# Altium PCB PCB1.PcbDoc
Units mil, origin at the board's own origin, x right, y up, seen from the top; angles counter-clockwise.
Board outline 2940 x 1375 mil, 2 copper layers (Top Layer, Bottom Layer); 36 components, 23 nets, 118 pads, 191 vias.
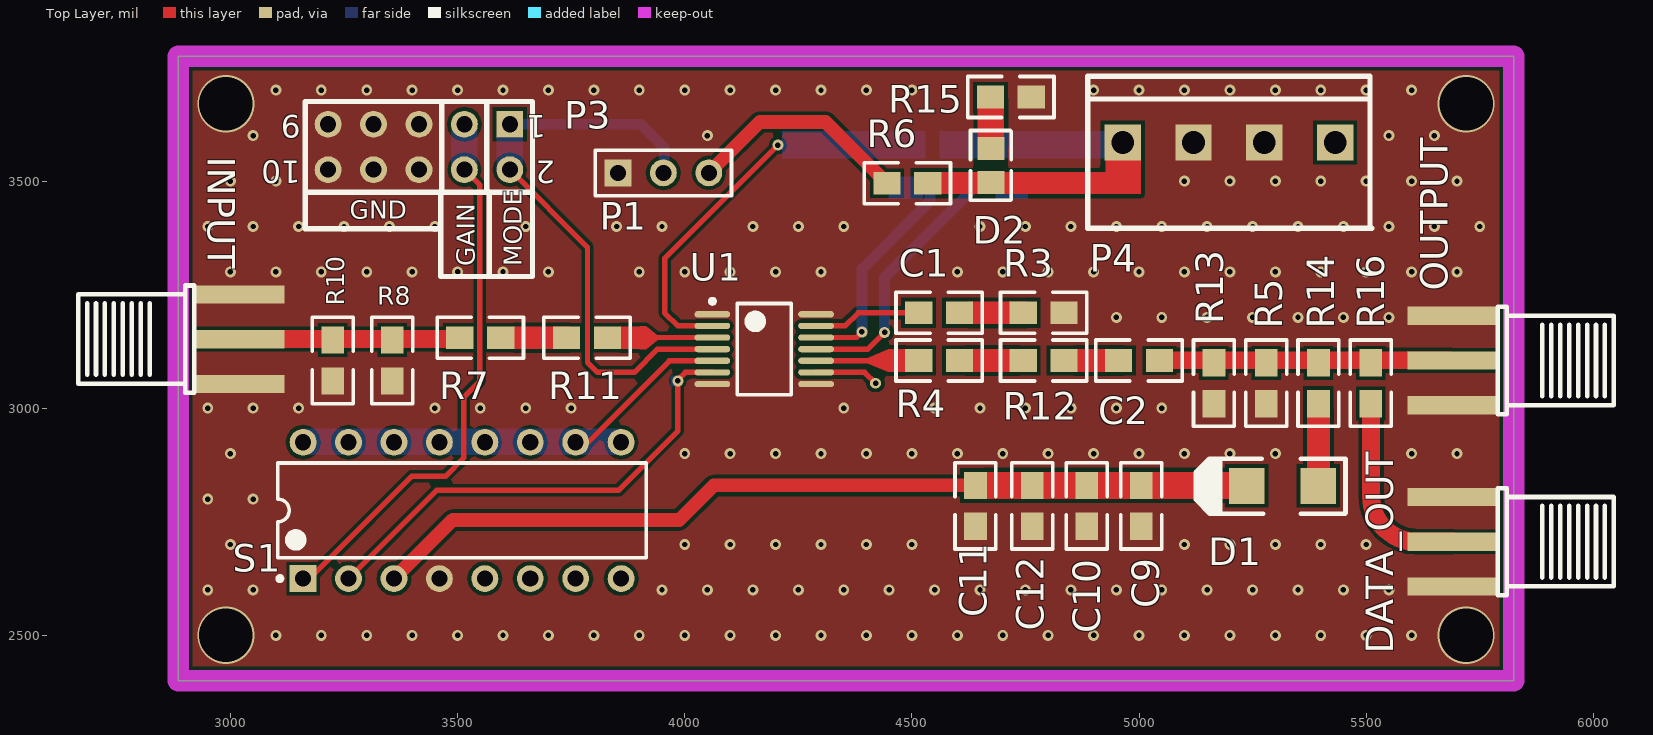
[diagram p0: Top Layer view]
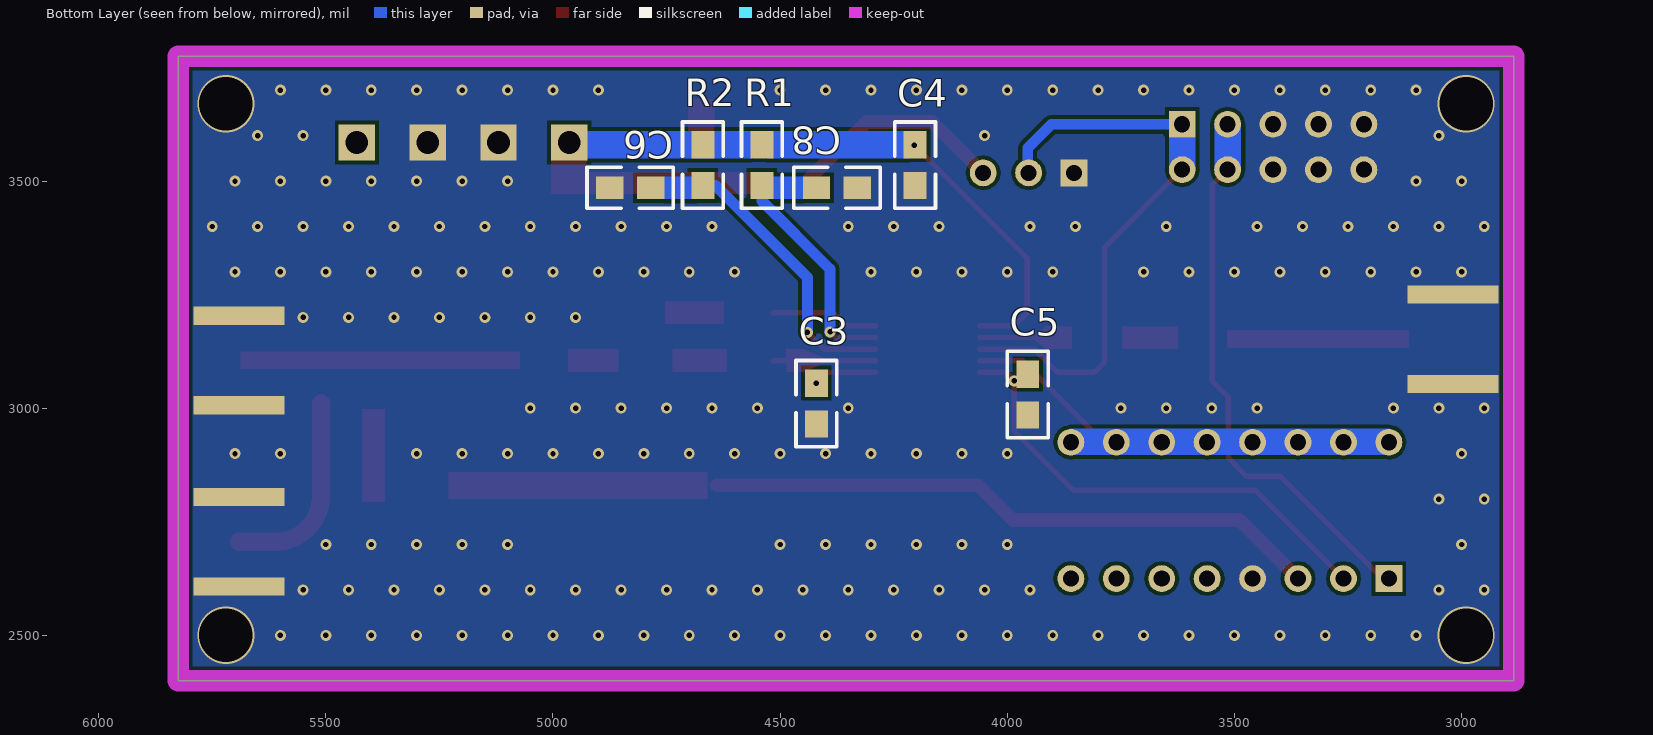
[diagram p1: Bottom Layer view, seen from below]

## Layer stack, top to bottom
Top Solder: solder mask 0.4, Solder Resist, Dk 3.5
Top Layer: signal copper 1.4
Dielectric 1: dielectric 12.6, FR-4, Dk 4.8
Bottom Layer: signal copper 1.4
Bottom Solder: solder mask 0.4, Solder Resist, Dk 3.5

## Board outline
2885,2400 2885,3775 5825,3775 5825,2400

## Design rules (kind name [scope] priority, off if disabled: settings)
Clearance [All] p1: gap=8
PolygonConnect [All] p1: connectstyle=Direct reliefconductorwidth=10 reliefentries=4 polygonreliefangle="90 Angle" airgapwidth=10
RoutingVias [All] p1: holewidth=28 width=50 viastyle="Through Hole" minholewidth=28 minwidth=50 maxholewidth=28 maxwidth=50
SolderMaskExpansion [All] p1: expansion=4
Width [All] p1: maxlimit=90 minlimit=8 preferedwidth=10
30 further rules are at their usual default settings.

## Components (designator, comment, footprint, x,y, rotation, side; value= is the part's Value field where it differs from the comment)
C1 "10nF" 0805 4605,3210 r180 top
C2 "0.1uf" 0805 5045,3105 r180 top
C3 "10nF" 0805 4420,2965 r90 bottom
C4 "1uF" 0805 4203,3490 r90 bottom
C5 "0.1uf" 0805 3955,2985 r90 bottom
C6 "0.1uf" 0805 4875,3485 r180 bottom
C8 "0.1uf" 0805 4330,3485 r0 bottom
C9 "0.1uf" 0805 5005,2740 r90 top
C10 "0.1uf" 0805 4885,2740 r90 top
C11 "0.1uf" 0805 4640,2830 r270 top
C12 "0.1uf" 0805 4765,2830 r270 top
D1 "5.6V" SMA/DO-214AC 5394.48,2829 r180 top
D2 "LED" 0805_s 4660.22,3555.07 r90 top
DATA_OUT "差分输出" SMA-LYING 5750,2710 r180 top (schematic designator Vo_S3)
INPUT "差分输出" SMA-LYING 2960,3148 r0 top (schematic designator Vo_S1)
OUTPUT "差分输出" SMA-LYING 5750,3109 r180 top (schematic designator Vo_S2)
P1 "Header 3" HDR1X3 3853,3518 r0 top
P3 "Header 5X2" HDR2X5 3615,3625 r180 top
P4 "VH3.96-4A" VH3.96-4P 4887.32,3730.67 r0 top
R1 "4.7R" 0805 4540,3490 r90 bottom
R2 "4.7R" 0805 4670,3490 r90 bottom
R3 "100R" 0805 4835,3210 r180 top
R4 "150R" 0805 4605,3105 r180 top
R5 "820R" 0805 5280,3010 r90 top
R6 "10k" 0805 4535,3495 r180 top
R7 "150R" 0805 3595,3155 r180 top
R8 "820R" 0805 3356,3060 r90 top
R10 "62R" 0805 3225,3060 r90 top
R11 "24R" 0805 3740,3155 r0 top
R12 "24R" 0805 4745,3105 r0 top
R13 "62R" 0805 5165,3010 r90 top
R14 "200K" 0805 5395,3010 r90 top
R15 "200K" 0805 4673,3685 r0 top
R16 "200K" 0805 5510,3100 r270 top
S1 "SW DIP-8" DIP-16 3510,2775 r90 top
U1 "AD8367" TSSOP14_M 4175,3130 r0 top

## Footprints (in the part's own frame and the unit in brackets; to place one, negate y for a bottom-side part, rotate by r counter-clockwise, add the part's x,y. Pads: shape width x height; smd on the part's side, far side on the other; paste and mask are expansions set on the pad)
0805 [mil]
  rect 60x50 smd: 1(0,0) 2(90,0)
  silkscreen extent -50,-45 140,45
0805_s [mm]
  rect 1.3x1.499 smd: 1(0.425,-0.35) 2(-1.475,-0.35)
  silkscreen extent -2.47,-1.49 1.43,0.79
DIP-16 [mm] "DIP, 16-Pin, Row Spacing 7.62 mm, Pitch 2.54 mm"
  rect 1.5x1.5 hole 0.9: 1(-3.81,8.89)
  round 1.5 hole 0.9: 2(-3.81,6.35) 3(-3.81,3.81) 4(-3.81,1.27) 5(-3.81,-1.27) 6(-3.81,-3.81) 7(-3.81,-6.35) 8(-3.81,-8.89) 9(3.81,-8.89) 10(3.81,-6.35) 11(3.81,-3.81) 12(3.81,-1.27) 13(3.81,1.27) 14(3.81,3.81) 15(3.81,6.35) 16(3.81,8.89)
  silkscreen extent -3.93,-10.3 2.65,10.31, body extent -3.6,-10.28 3.6,10.28, height 5.08
HDR1X3 [mm] "Connector; Header; 3 Position"
  rect 1.5x1.5 hole 0.9: 1(0,0)
  round 1.5 hole 0.9: 2(2.54,0) 3(5.08,0)
  silkscreen extent -1.27,-1.27 6.35,1.27
HDR2X5 [mm] "Connector; Header; 5x2 Position"
  rect 1.5x1.5 hole 0.9: 1(0,0)
  round 1.5 hole 0.9: 2(0,2.54) 3(2.54,0) 4(2.54,2.54) 5(5.08,0) 6(5.08,2.54) 7(7.62,0) 8(7.62,2.54) 9(10.16,0) 10(10.16,2.54)
  silkscreen extent -1.27,-1.27 11.43,3.81
SMA-LYING [mm]
  rect 5.08x1.016 smd: 0(1.5,0.1) 1(1.5,2.6) 1(1.5,-2.4)
  rect 5.08x1.016 smd far side: 1(1.5,2.6) 1(1.5,-2.4)
  silkscreen extent -7.5,-2.9 -1,3.1
SMA/DO-214AC [mm]
  rect 2x2 smd: 1(0,0) 2(4,0)
  silkscreen extent -1.52,-1.52 6.86,1.55
TSSOP14_M [mm] "TSSOP, 14-Leads, Body 5.1x4.5mm, Pitch 0.65mm, IPC Low Density"
  oval 2x0.35 smd: 1(-2.9,1.95) 2(-2.9,1.3) 3(-2.9,0.65) 4(-2.9,0) 5(-2.9,-0.65) 6(-2.9,-1.3) 7(-2.9,-1.95) 8(2.9,-1.95) 9(2.9,-1.3) 10(2.9,-0.65) 11(2.9,0) 12(2.9,0.65) 13(2.9,1.3) 14(2.9,1.95)
  silkscreen extent -3.02,-2.55 1.5,2.8, body extent -2.25,-2.55 2.25,2.55, height 1.2
VH3.96-4P [mil]
  rect 80x80 hole 50: 1(76.77,-145.67) 2(232.68,-145.67) 3(388.58,-145.67) 4(544.49,-145.67)
  silkscreen extent 0,-335 625,0

## Part data
C1 C2 C3 C4 C5 C6 C8 C9 C10 C11 C12: library part Cap
D1: library part 肖特基-5.6V
DATA_OUT INPUT OUTPUT: library part SMA
P1: "Header, 3-Pin"
P3: "Header, 5-Pin, Dual row"
R1 R2 R3 R4 R5 R6 R7 R8 R10 R11 R12 R13 R14 R15 R16: library part Res
S1: "DIP Switch, 8 Position, SPST"

## Via types
v1: diameter 24, hole 12, Top Layer to Bottom Layer, 187 vias
v2: diameter 125.98, hole 118.11, Top Layer to Bottom Layer, 4 vias

## Nets (pads, with @x,y where several pads share a name; then routed paths per layer and width w, separated by ;. In a path a pad name is that pad's centre, name@x,y a point inside that pad or via, vN(x,y) a via of type N, cw(c..) or ccw(c..) an arc to the next point about the centre after c; other vN are vias at no path point)
5V: C4.2 D2.2 P4.1 R1.2 R2.2 R6.1 U1.2 | length 588.9
  Top Layer w12: U1.2 3984.82,3181.18 3956,3210 3956,3330 v1(4205,3579)
DETO: C5.2 S1.2 U1.6 | length 1054.8
  Top Layer w12: S1.2 3454,2819 3854,2819 3985,2950 v1(3985,3060) 3985,3062.64 4001.18,3078.82 U1.6
DIO: C9.2 C10.2 C11.1 C12.1 D1.2 S1.3 | length 1364.9
  Top Layer w30: S1.3 3489,2754 3988,2754 4064,2830 C11.1
GAIN: S1.9 S1.10 S1.11 S1.12 S1.13 S1.14 S1.15 S1.16 U1.5 | length 375.1
  Top Layer w12: S1.10 3787,2925 3966.41,3104.41 U1.5
GND: C3.1 C4.1 C5.1 C6.1 C8.1 C9.1 C10.1 C11.2 C12.2 DATA_OUT.1 INPUT.1 OUTPUT.1 P1.1 P3.5 P3.6 P3.7 P3.8 P3.9 P3.10 P4.2 P4.3 R3.1 R5.1 R8.1 R10.1 R13.1 R15.2 S1.4 U1.1 U1.7 U1.8 U1.14
  other v1: 3100,2500 3200,2500 3300,2500 3400,2500 3500,2500 3600,2500 3700,2500 3800,2500 3900,2500 4000,2500 4100,2500 4200,2500 4300,2500 4400,2500 4500,2500 4600,2500 4700,2500 4800,2500 4900,2500 5000,2500 5100,2500 5200,2500 5300,2500 5400,2500 5500,2500 5600,2500 2950,2600 3050,2600 3950,2600 4050,2600 4150,2600 4250,2600 4350,2600 4450,2600 4550,2600 4650,2600 4750,2600 4850,2600 4950,2600 5050,2600 5150,2600 5250,2600 5350,2600 5450,2600 5550,2600 3000,2700 4000,2700 4100,2700 4200,2700 4300,2700 4400,2700 4500,2700 5100,2700 5200,2700 5300,2700 5400,2700 5500,2700 2950,2800 3050,2800 3000,2900 4000,2900 4100,2900 4200,2900 4300,2900 4400,2900 4500,2900 4600,2900 4700,2900 4800,2900 4900,2900 5000,2900 5100,2900 5200,2900 5300,2900 5600,2900 5700,2900 2950,3000 3050,3000 3150,3000 3450,3000 3550,3000 3650,3000 3750,3000 4350,3000 4550,3000 4650,3000 4750,3000 4850,3000 4950,3000 5050,3000 4950,3200 5050,3200 5150,3200 5250,3200 5350,3200 5450,3200 5550,3200 3000,3300 3100,3300 3200,3300 3300,3300 3400,3300 3500,3300 3600,3300 3700,3300 3900,3300 4000,3300 4100,3300 4200,3300 4300,3300 4600,3300 4700,3300 4800,3300 4900,3300 5000,3300 5100,3300 5200,3300 5300,3300 5400,3300 5500,3300 5600,3300 5700,3300 2950,3400 3050,3400 3150,3400 3250,3400 3350,3400 3450,3400 3650,3400 3850,3400 3950,3400 4150,3400 4250,3400 4350,3400 4650,3400 4750,3400 4850,3400 4950,3400 5050,3400 5150,3400 5250,3400 5350,3400 5450,3400 5550,3400 5650,3400 5750,3400 3000,3500 3100,3500 5100,3500 5200,3500 5300,3500 5400,3500 5500,3500 5600,3500 5700,3500 3050,3600 4050,3600 5550,3600 5650,3600 3100,3700 3200,3700 3300,3700 3400,3700 3500,3700 3600,3700 3700,3700 3800,3700 3900,3700 4000,3700 4100,3700 4200,3700 4300,3700 4400,3700 4500,3700 4900,3700 5000,3700 5100,3700 5200,3700 5300,3700 5400,3700 5500,3700 5600,3700
  other v2: 2990,2500 5720,2500 2990,3670 5720,3670
MCU: P3.3 P3.4 S1.1 | length 1126.8
  Top Layer w12: S1.1 3174,2625 3399,2850 3473,2850 3514,2891 3514,3025 3549,3060 3549,3491 P3.4
MODE: P1.2 P3.1 P3.2 U1.4 | length 1216.4
  Top Layer w12: P3.2 3786,3354 3786,3101 3808,3079 3889,3079 3940,3130 U1.4
  Bottom Layer w24: P3.1 3903,3625 3955,3573 P1.2@3955,3518
NetC1_1: C1.1 R3.2
NetC1_2: C1.2 U1.13 | length 237.8
  Top Layer w12: U1.13 4353.18,3181.18 4382,3210 C1.2
NetC2_1: C2.1 OUTPUT.0 R5.2 R13.2 R14.2 R16.1
NetC2_2: C2.2 R12.2
NetC3_2: C3.2 U1.9 | length 140.7
  Top Layer w12: U1.9 4396.18,3078.82 v1(4420,3055)
NetC6_2: C6.2 R2.1 U1.11 | length 600.8
  Top Layer w12: U1.11 4403,3130 v1(4440,3167)
  Bottom Layer w24: v1(4440,3167) 4440,3288 4642,3490 R2.1
NetC8_2: C8.2 R1.1 U1.12 | length 490.1
  Top Layer w12: U1.12 4377.59,3155.59 v1(4390,3168)
  Bottom Layer w24: v1(4390,3168) 4390,3306 4540,3456 R1.1
NetD1_1: D1.1 R14.1
NetD2_1: D2.1 R15.1
NetP1_3: P1.3 R6.2 | length 494.3
  Top Layer w30: P1.3 4165,3630 4310,3630 R6.2
NetR4_1: R4.1 R12.1
NetR4_2: R4.2 U1.10 | length 226.4
  Top Layer w12: U1.10 4515,3104.41 R4.2
NetR7_1: R7.1 R11.1
NetR7_2: INPUT.0 R7.2 R8.2 R10.2
NetR11_2: R11.2 U1.3 | length 165.2
  Top Layer w12: 3895.59,3155.59 U1.3
NetR16_2: DATA_OUT.0 R16.2 | length 441.5
  Top Layer w40: R16.2 cw(c5510,3009) 5511,3009 5511,2806.06 ccw(c5611,2806.06) 5611,2706.06 DATA_OUT.0
pads on no net: P4.4 S1.5 S1.6 S1.7 S1.8

## Polygon pours and split planes (outlines as drawn)
GND on Top Layer "Top Layer-No Net" (solid, pour order 12): 2885,3775 2885,2400 5825,2400 5825,3775
GND on Bottom Layer "Top Layer-No Net" (solid, pour order 14): 5825,2400 2885,2400 2885,3775 5825,3775

## Keep-outs
Keep-Out Layer:
  the board outline again, w47.24

## Other copper
Top Layer:
  rectangle net 5V: 4926,3471 5004,3622
  rectangle net NetD2_1: 4645,3575 4703,3681
  rectangle net 5V: 4559,3471 5004,3520
  rectangle net NetR7_2: 3116,3133 3516,3172
  rectangle net NetR7_1: 3624,3130 3748,3180
  rectangle net NetR11_2: 3857,3130 3901,3180
  rectangle net DIO: 4660,2800 5230,2860
  rectangle net NetD1_1: 5370,2794 5420,2998
  rectangle net NetC2_1: 5073,3086 5688,3125
  rectangle net NetC1_1: 4624,3185 4753,3235
  rectangle net NetR4_1: 4617,3080 4737,3130
  rectangle net NetC2_2: 4856,3080 4967,3130
  region net NetR11_2: 3901,3180 3901,3130 3915,3130 3940,3150 3940,3161 3915,3180
  region net NetR4_2: 4485,3080 4447,3080 4402,3099 4402,3110 4448,3130 4486,3130
Bottom Layer:
  rectangle net DETO: 3969,3048 3985,3072
  rectangle net MODE: 3586,3521 3644,3596
  rectangle net MCU: 3485,3524 3544,3626
  rectangle net NetC8_2: 4449,3460 4524,3510
  rectangle net NetC6_2: 4684,3460 4756,3510
  rectangle net 5V: 4214,3550 4530,3610
  rectangle net 5V: 4561,3550 4937,3610
  rectangle net GAIN: 3159,2897 3863,2955

## Silkscreen, mask and mechanical layers (free items; w line width, h text height)
Top Overlay:
  lines w11.81: 3463,3396 3463,3290 3570,3290 ; 3463,3476 3463,3395.29 3165,3395.29 3165,3475 ; 3465,3675 3465,3476 3466,3475 ; 3564,3674 3564,3481 3570,3475 ; 3570,3305 3570,3290 ; 3165,3475 3165,3675 3665,3675 3665,3475 ; 3165,3475 3466,3475 ; 3466,3475 3570,3475 ; 3466,3475 3665,3475 ; 3570,3290 3570,3475 ; 3570,3290 3665,3290 3665,3475 ; 3570,3475 3665,3475
  text "GND" at 3263,3417 h40
  text "GAIN" at 3538,3313 h40 r90
  text "MODE" at 3641,3313 h40 r90

## Text inside footprints (layer, text, board x,y; h text height)
P3: Top Overlay "2" at 3715,3545 h50 r180; Top Overlay "1" at 3695,3645 h50 r180; Top Overlay "9" at 3155,3645 h50 r180; Top Overlay "10" at 3155,3545 h50 r180